# EAGLE board remote_v0.9-default.cb94c48f (EAGLE 7.7.0)
BOARDNAME: BERTL-06-1; REVISION: R1.0; VERSION: V1.0
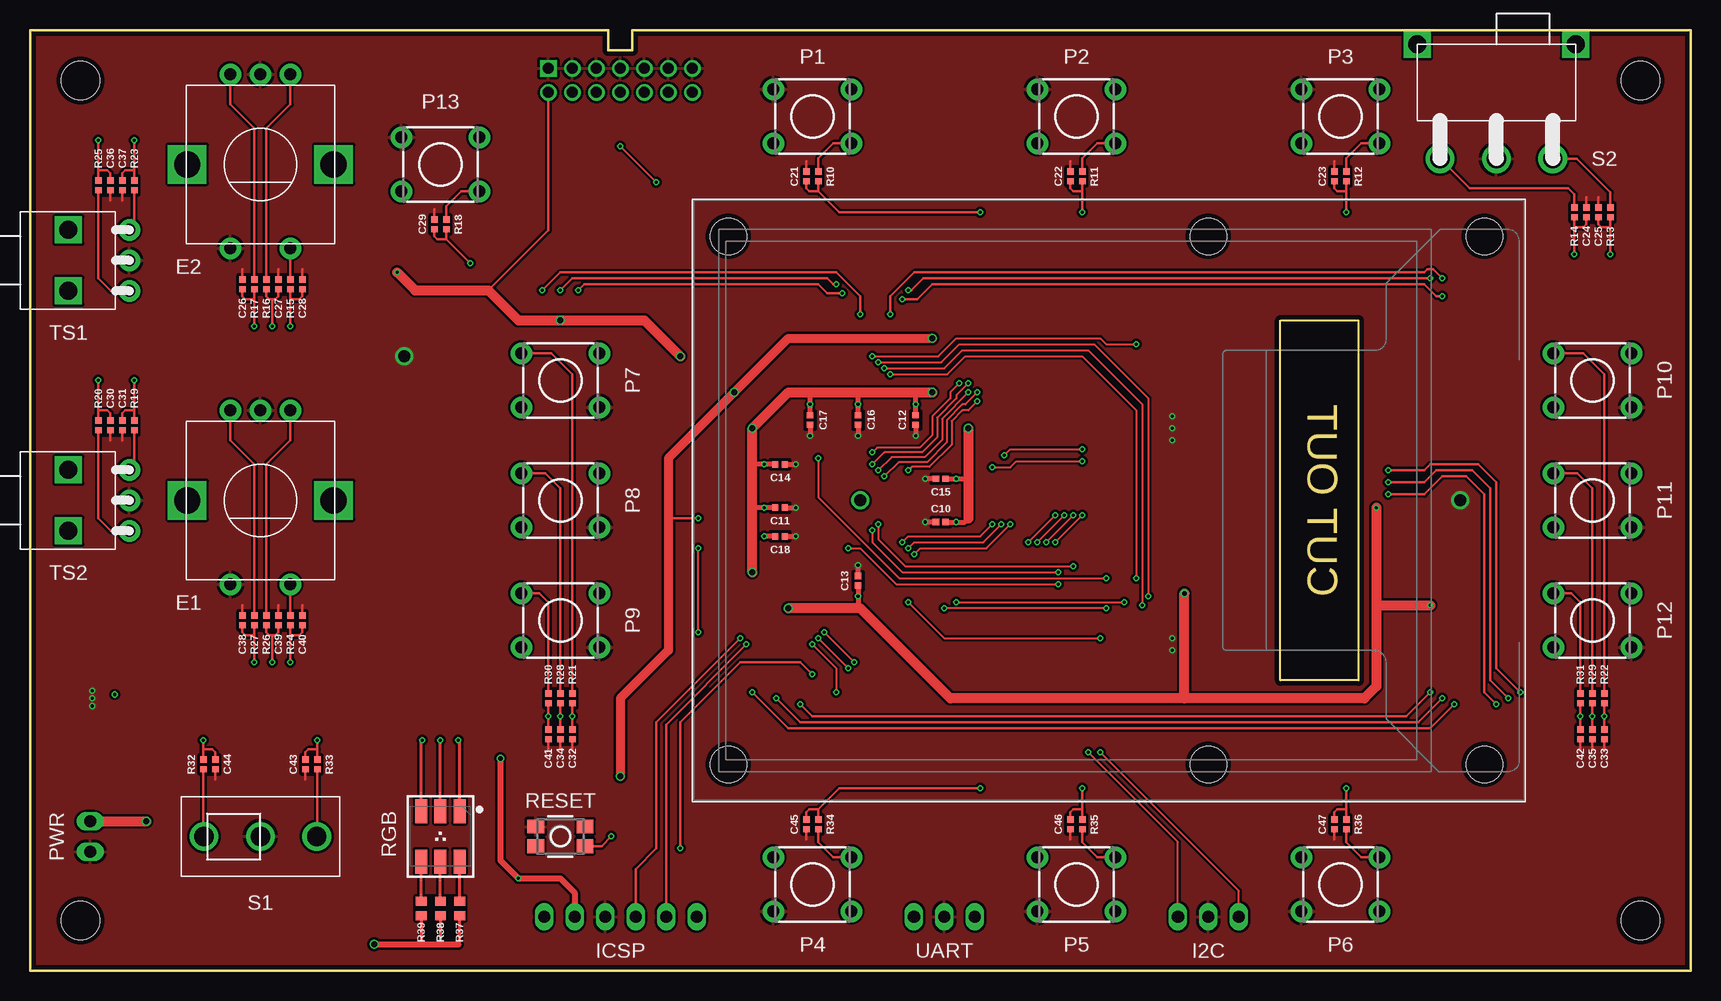
[diagram p0: board, top side]
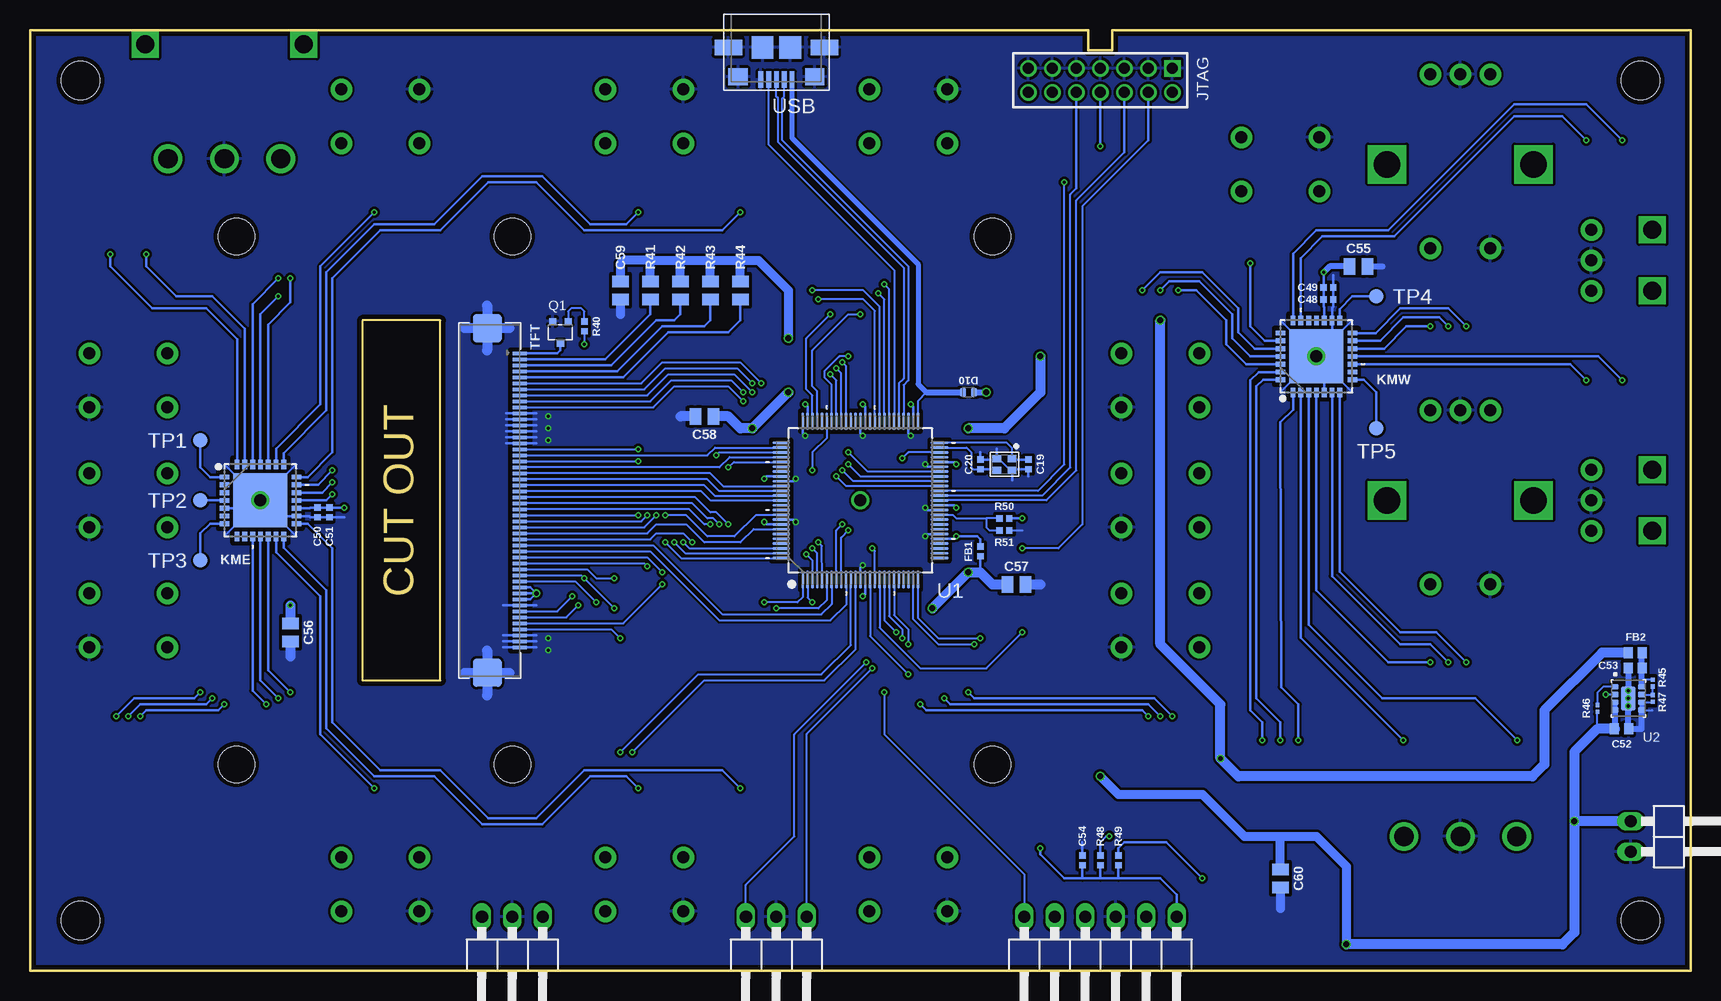
[diagram p1: board, bottom side, seen from below]

Size 138.4 x 78.4 mm. Coordinates in mm from the lower left corner, seen from the top.
Outline: 0,78.4 48.2,78.4 48.2,76.7 50.2,76.7 50.2,78.4 138.4,78.4 138.4,0 0,0 0,78.4
Outline: 104.2,54.2 110.7,54.2 110.7,24.2 104.2,24.2 104.2,54.2
Copper layers (1*16): Top 0.0356mm / dielectric 1.5011mm / Bottom 0.0356mm
Design rules "OSHPark-2layer-new *": minimum track width 6mil, minimum drill 10mil, track to track 6mil, track to pad 6mil, pad to pad 6mil, via to via 6mil, smd to smd 6mil, copper to edge 15mil, drill to drill 6mil, minimum pad ring 5mil, minimum via ring 5mil, stop-mask expansion 2mil, vias tented up to drill 25mil, thermal gap 10mil
Net classes: 0 default: width 0.152 mm, drill 0.254 mm, clearance 0.152 mm
Holes 3.2 mm at 4.2,74.2 4.2,4.2 134.2,4.2 134.2,74.2
Holes 3 mm at 121.2,61.2 58.2,61.2 58.2,17.2 121.2,17.2 98.2,61.2 98.2,17.2
tKeepout: area 55.7,58.7 to 60.7,63.7; area 95.7,58.7 to 100.7,63.7; area 118.7,58.7 to 123.7,63.7; area 118.7,14.7 to 123.7,19.7; area 95.7,14.7 to 100.7,19.7; area 55.7,14.7 to 60.7,19.7; area 130.2,0.2 to 138.2,8.2; area 130.2,70.2 to 138.2,78.2; area 0.2,70.2 to 8.2,78.2; area 0.2,0.2 to 8.2,8.2
bKeepout: area 54.2,57.2 to 62.2,65.2; area 94.2,57.2 to 102.2,65.2; area 117.2,57.2 to 125.2,65.2; area 117.2,13.2 to 125.2,21.2; area 94.2,13.2 to 102.2,21.2; area 54.2,13.2 to 62.2,21.2; area 0.2,70.2 to 8.2,78.2; area 0.2,0.2 to 8.2,8.2; area 130.2,0.2 to 138.2,8.2; area 130.2,70.2 to 138.2,78.2

## Footprints (pad centres in the part's own frame; a part is rotated, then mirrored left to right if it is on the bottom)
0402-C = smd 0.52 x 0.52: 1 -0.4,0; 2 0.4,0
0603-C = smd 0.75 x 0.9: 1 -0.6,0; 2 0.6,0
0805-C = smd 0.95 x 1.35: 1 -0.75,0; 2 0.75,0
DFN1006D-2 = smd 0.5 x 0.7: A 0.45,0; C -0.45,0
EC11_SW = drill 1 pad 1.778: A -2.5,-7.5; B 2.5,-7.5; C 0,-7.5; D -2.5,7; E 2.5,7 | drill 2.2 square: GND1 -6.1,0; GND2 6.1,0
1X03/90 = drill 1.016 long: 1 -2.54,-3.81; 2 0,-3.81; 3 2.54,-3.81
1X06/90 = drill 1.016 long: 1 -6.35,-3.81; 2 -3.81,-3.81; 3 -1.27,-3.81; 4 1.27,-3.81; 5 3.81,-3.81; 6 6.35,-3.81
2X07M = drill 0.914 square: 1 -6,-1 | drill 0.914: 2 -6,1; 3 -4,-1; 4 -4,1; 5 -2,-1; 6 -2,1; 7 0,-1; 8 0,1; 9 2,-1; 10 2,1; 11 4,-1; 12 4,1; 13 6,-1; 14 6,1
QFN65P600X600X100-29N = smd 0.8 x 0.4: 1 -3,1.95; 2 -3,1.3; 3 -3,0.65; 4 -3,0; 5 -3,-0.65; 6 -3,-1.3; 7 -3,-1.95; 15 3,-1.95; 16 3,-1.3; 17 3,-0.65; 18 3,0; 19 3,0.65; 20 3,1.3; 21 3,1.95 | smd 0.4 x 0.8: 8 -1.95,-3; 9 -1.3,-3; 10 -0.65,-3; 11 0,-3; 12 0.65,-3; 13 1.3,-3; 14 1.95,-3; 22 1.95,3; 23 1.3,3; 24 0.65,3; 25 0,3; 26 -0.65,3; 27 -1.3,3; 28 -1.95,3 | smd 4.5 x 4.5: EP 0,0
6X6-THT = drill 1 pad 1.778: 1 -3.25,2.25; 2 3.25,2.25; 3 -3.25,-2.25; 4 3.25,-2.25
1X02/90 = drill 1.016 long: 1 -2.54,-3.81; 2 0,-3.81
SOT323 = smd 0.6 x 0.55: 1 -0.65,-0.925; 2 0.65,-0.925; 3 0,0.925
0201-C = smd 0.36 x 0.32: 1 -0.28,0; 2 0.28,0
3X4MM = smd 1.4 x 1.15: 1 -2.05,0.825; 2 2.05,0.825; 3 -2.05,-0.825; 4 2.05,-0.825
RGBLED_PLCC6 = smd 1 x 2: 1 -1.6,-2.108; 2 0,-2.108; 3 1.6,-2.108; 4 1.6,2.108; 5 0,2.108; 6 -1.6,2.108
1101M2S3CBE2 = drill 1.6: 1 -4.699,0; 2 0,0; 3 4.699,0
1101M2S3ABE2 = drill 1.6: 1 -4.699,9.525; 2 0,9.525; 3 4.699,9.525 | drill 1.5 square: 4 -6.604,0; 5 6.604,0
TFT_2.83IN_240X320_50PIN = smd 0.275 x 1.2 bottom: 1 12.25,-10.39; 2 11.75,-10.39; 3 11.25,-10.39; 4 10.75,-10.39; 5 10.25,-10.39; 6 9.75,-10.39; 7 9.25,-10.39; 8 8.75,-10.39; 9 8.25,-10.39; 10 7.75,-10.39; 11 7.25,-10.39; 12 6.75,-10.39; 13 6.25,-10.39; 14 5.75,-10.39; 15 5.25,-10.39; 16 4.75,-10.39; 17 4.25,-10.39; 18 3.75,-10.39; 19 3.25,-10.39; 20 2.75,-10.39; 21 2.25,-10.39; 22 1.75,-10.39; 23 1.25,-10.39; 24 0.75,-10.39; 25 0.25,-10.39; 26 -0.25,-10.39; 27 -0.75,-10.39; 28 -1.25,-10.39; 29 -1.75,-10.39; 30 -2.25,-10.39; 31 -2.75,-10.39; 32 -3.25,-10.39; 33 -3.75,-10.39; 34 -4.25,-10.39; 35 -4.75,-10.39; 36 -5.25,-10.39; 37 -5.75,-10.39; 38 -6.25,-10.39; 39 -6.75,-10.39; 40 -7.25,-10.39; 41 -7.75,-10.39; 42 -8.25,-10.39; 43 -8.75,-10.39; 44 -9.25,-10.39; 45 -9.75,-10.39; 46 -10.25,-10.39; 47 -10.75,-10.39; 48 -11.25,-10.39; 49 -11.75,-10.39; 50 -12.25,-10.39 | smd 2.4 x 2.4 bottom: PAD1 14.35,-13.09; PAD2 -14.35,-13.09
TP12R = smd 1.2 x 1.2: TP 0,0
200SPXTXBXM6 = drill 1 pad 1.778: 1 -2.54,5.08; 2 0,5.08; 3 2.54,5.08 | drill 1.5 square: 4 -2.54,0; 5 2.54,0
QFP40P1400X1400X120-100N = smd 1.473 x 0.229: 1 -6.6,4.8; 2 -6.6,4.4; 3 -6.6,4; 4 -6.6,3.6; 5 -6.6,3.2; 6 -6.6,2.8; 7 -6.6,2.4; 8 -6.6,2; 9 -6.6,1.6; 10 -6.6,1.2; 11 -6.6,0.8; 12 -6.6,0.4; 13 -6.6,0; 14 -6.6,-0.4; 15 -6.6,-0.8; 16 -6.6,-1.2; 17 -6.6,-1.6; 18 -6.6,-2; 19 -6.6,-2.4; 20 -6.6,-2.8; 21 -6.6,-3.2; 22 -6.6,-3.6; 23 -6.6,-4; 24 -6.6,-4.4; 25 -6.6,-4.8; 51 6.6,-4.8; 52 6.6,-4.4; 53 6.6,-4; 54 6.6,-3.6; 55 6.6,-3.2; 56 6.6,-2.8; 57 6.6,-2.4; 58 6.6,-2; 59 6.6,-1.6; 60 6.6,-1.2; 61 6.6,-0.8; 62 6.6,-0.4; 63 6.6,0; 64 6.6,0.4; 65 6.6,0.8; 66 6.6,1.2; 67 6.6,1.6; 68 6.6,2; 69 6.6,2.4; 70 6.6,2.8; 71 6.6,3.2; 72 6.6,3.6; 73 6.6,4; 74 6.6,4.4; 75 6.6,4.8 | smd 0.229 x 1.473: 26 -4.8,-6.6; 27 -4.4,-6.6; 28 -4,-6.6; 29 -3.6,-6.6; 30 -3.2,-6.6; 31 -2.8,-6.6; 32 -2.4,-6.6; 33 -2,-6.6; 34 -1.6,-6.6; 35 -1.2,-6.6; 36 -0.8,-6.6; 37 -0.4,-6.6; 38 0,-6.6; 39 0.4,-6.6; 40 0.8,-6.6; 41 1.2,-6.6; 42 1.6,-6.6; 43 2,-6.6; 44 2.4,-6.6; 45 2.8,-6.6; 46 3.2,-6.6; 47 3.6,-6.6; 48 4,-6.6; 49 4.4,-6.6; 50 4.8,-6.6; 76 4.8,6.6; 77 4.4,6.6; 78 4,6.6; 79 3.6,6.6; 80 3.2,6.6; 81 2.8,6.6; 82 2.4,6.6; 83 2,6.6; 84 1.6,6.6; 85 1.2,6.6; 86 0.8,6.6; 87 0.4,6.6; 88 0,6.6; 89 -0.4,6.6; 90 -0.8,6.6; 91 -1.2,6.6; 92 -1.6,6.6; 93 -2,6.6; 94 -2.4,6.6; 95 -2.8,6.6; 96 -3.2,6.6; 97 -3.6,6.6; 98 -4,6.6; 99 -4.4,6.6; 100 -4.8,6.6
MICROSIP = smd 0.48 x 0.58: 1 -0.975,-1.1; 2 -0.325,-1.1; 3 0.325,-1.1; 4 0.975,-1.1; 5 0.975,1.1; 6 0.325,1.1; 7 -0.325,1.1; 8 -0.975,1.1 | smd 2 x 1.2: EP 0,0
MICRO-AB-H-SMT = smd 0.4 x 1.35: 1 -1.3,4.125; 2 -0.65,4.125; 3 0,4.125; 4 0.65,4.125; 5 1.3,4.125 | smd 2.3 x 1.3: Z1 -4,1.45; Z4 4,1.45 | smd 1.8 x 1.9: Z2 -1.15,1.45; Z3 1.15,1.45 | smd 1.6 x 1.4: Z5 -3.2,3.9; Z6 3.2,3.9
2.0X1.6 = smd 0.75 x 0.65: 1 -0.65,-0.5; 2 0.65,-0.5; 3 0.65,0.5; 4 -0.65,0.5

## Placement (x,y rotation side)
C10  100n  [0402-C]  75.9,37.4 180 top
C11  100n  [0402-C]  62.5,38.6 0 top
C12  100n  [0402-C]  73.8,45.9 270 top
C13  100n  [0402-C]  69,32.5 90 top
C14  100n  [0402-C]  62.5,42.2 0 top
C15  100n  [0402-C]  75.9,41 180 top
C16  100n  [0402-C]  69,45.9 270 top
C17  100n  [0402-C]  65,45.9 270 top
C18  100n  [0402-C]  62.5,36.2 0 top
C19  100n  [0402-C]  55.2,42.2 270 bottom
C20  100n  [0402-C]  59.2,42.2 90 bottom
C21  [0402-C]  64.7,66.2 90 top
C22  [0402-C]  86.7,66.2 90 top
C23  [0402-C]  108.7,66.2 90 top
C24  [0402-C]  129.7,63.2 90 top
C25  [0402-C]  130.7,63.2 90 top
C26  [0402-C]  17.7,57.2 90 top
C27  [0402-C]  20.7,57.2 90 top
C28  [0402-C]  22.7,57.2 90 top
C29  [0402-C]  33.7,62.2 90 top
C30  [0402-C]  6.7,45.45 270 top
C31  [0402-C]  7.7,45.45 270 top
C32  [0402-C]  45.2,19.7 90 top
C33  [0402-C]  131.2,19.7 90 top
C34  [0402-C]  44.2,19.7 90 top
C35  [0402-C]  130.2,19.7 90 top
C36  [0402-C]  6.7,65.45 270 top
C37  [0402-C]  7.7,65.45 270 top
C38  [0402-C]  17.7,29.2 90 top
C39  [0402-C]  20.7,29.2 90 top
C40  [0402-C]  22.7,29.2 90 top
C41  [0402-C]  43.2,19.7 90 top
C42  [0402-C]  129.2,19.7 90 top
C43  [0402-C]  22.95,17.2 270 top
C44  [0402-C]  15.45,17.2 270 top
C45  [0402-C]  64.7,12.2 90 top
C46  [0402-C]  86.7,12.2 90 top
C47  [0402-C]  108.7,12.2 90 top
C48  100n  [0402-C]  30.2,55.95 0 bottom
C49  100n  [0402-C]  30.2,56.95 0 bottom
C50  100n  [0402-C]  114.45,38.2 270 bottom
C51  100n  [0402-C]  113.45,38.2 270 bottom
C52  [0603-C]  5.77,20.16 0 bottom
C53  [0603-C]  4.63,25.24 180 bottom
C54  [0402-C]  50.7,9.2 90 bottom
C55  100n  [0805-C]  27.7,58.7 0 bottom
C56  100n  [0805-C]  116.7,28.2 270 bottom
C57  [0805-C]  56.2,32.2 0 bottom
C58  [0805-C]  82.2,46.2 180 bottom
C59  100n  [0805-C]  89.2,56.7 270 bottom
C60  100n  [0805-C]  34.2,7.7 270 bottom
D10  PMEG2010BELD  [DFN1006D-2]  60.2,48.2 180 bottom
E1  EC11_SW  [EC11_SW]  19.2,39.2 180 top
E2  EC11_SW  [EC11_SW]  19.2,67.2 180 top
FB1  [0402-C]  59.2,34.95 90 bottom
FB2  [0603-C]  4.63,26.51 180 bottom
I2C  [1X03/90]  98.2,0.7 180 bottom
ICSP  [1X06/90]  49.2,0.7 180 bottom
JTAG  [2X07M]  49.2,74.2 180 bottom
KME  PIC16F1718-I/ML  [QFN65P600X600X100-29N]  119.2,39.2 0 bottom
KMW  PIC16F1718-I/ML  [QFN65P600X600X100-29N]  31.2,51.2 90 bottom
P1  DTSM-6THT  [6X6-THT]  65.2,71.2 0 top
P2  DTSM-6THT  [6X6-THT]  87.2,71.2 0 top
P3  DTSM-6THT  [6X6-THT]  109.2,71.2 0 top
P4  DTSM-6THT  [6X6-THT]  65.2,7.2 0 top
P5  DTSM-6THT  [6X6-THT]  87.2,7.2 0 top
P6  DTSM-6THT  [6X6-THT]  109.2,7.2 0 top
P7  DTSM-6THT  [6X6-THT]  44.2,49.2 0 top
P8  DTSM-6THT  [6X6-THT]  44.2,39.2 0 top
P9  DTSM-6THT  [6X6-THT]  44.2,29.2 0 top
P10  DTSM-6THT  [6X6-THT]  130.2,49.2 0 top
P11  DTSM-6THT  [6X6-THT]  130.2,39.2 0 top
P12  DTSM-6THT  [6X6-THT]  130.2,29.2 0 top
P13  DTSM-6THT  [6X6-THT]  34.2,67.2 0 top
PWR  [1X02/90]  1.2,9.91 270 bottom
Q1  NX3008NBKW  [SOT323]  94.2,53.2 180 bottom
R10  [0402-C]  65.7,66.2 90 top
R11  [0402-C]  87.7,66.2 90 top
R12  [0402-C]  109.7,66.2 90 top
R13  [0402-C]  131.7,63.2 90 top
R14  [0402-C]  128.7,63.2 90 top
R15  [0402-C]  21.7,57.2 270 top
R16  [0402-C]  19.7,57.2 90 top
R17  [0402-C]  18.7,57.2 90 top
R18  [0402-C]  34.7,62.2 270 top
R19  [0402-C]  8.7,45.45 270 top
R20  [0402-C]  5.7,45.45 270 top
R21  [0402-C]  45.2,22.7 90 top
R22  [0402-C]  131.2,22.7 90 top
R23  [0402-C]  8.7,65.45 270 top
R24  [0402-C]  21.7,29.2 270 top
R25  [0402-C]  5.7,65.45 270 top
R26  [0402-C]  19.7,29.2 90 top
R27  [0402-C]  18.7,29.2 90 top
R28  [0402-C]  44.2,22.7 90 top
R29  [0402-C]  130.2,22.7 90 top
R30  [0402-C]  43.2,22.7 90 top
R31  [0402-C]  129.2,22.7 90 top
R32  [0402-C]  14.45,17.2 270 top
R33  [0402-C]  23.95,17.2 270 top
R34  [0402-C]  65.7,12.2 90 top
R35  [0402-C]  87.7,12.2 90 top
R36  [0402-C]  109.7,12.2 90 top
R37  [0603-C]  35.8,5.2 90 top
R38  [0603-C]  34.2,5.2 90 top
R39  [0603-C]  32.6,5.2 90 top
R40  [0402-C]  92.2,53.7 270 bottom
R41  [0805-C]  86.7,56.7 270 bottom
R42  [0805-C]  84.2,56.7 270 bottom
R43  [0805-C]  81.7,56.7 270 bottom
R44  [0805-C]  79.2,56.7 270 bottom
R45  510k  [0201-C]  3.18,23.98 90 bottom
R46  10k  [0201-C]  7.78,21.88 270 bottom
R47  162k  [0201-C]  3.18,22.7 90 bottom
R48  [0402-C]  49.2,9.2 270 bottom
R49  [0402-C]  47.7,9.2 90 bottom
R50  10k  [0402-C]  57.2,37.7 0 bottom
R51  10k  [0402-C]  57.2,36.7 180 bottom
RESET  DTSM-6  [3X4MM]  44.2,11.2 0 top
RGB  [RGBLED_PLCC6]  34.2,11.2 180 top
S1  [1101M2S3CBE2]  19.2,11.2 0 top
S2  [1101M2S3ABE2]  122.2,77.2 180 top
TFT  [TFT_2.83IN_240X320_50PIN]  87.2,39.2 90 top
TP1  TPTP12R  [TP12R]  124.2,44.2 0 bottom
TP2  TPTP12R  [TP12R]  124.2,39.2 0 bottom
TP3  TPTP12R  [TP12R]  124.2,34.2 0 bottom
TP4  TPTP12R  [TP12R]  26.2,56.2 0 bottom
TP5  TPTP12R  [TP12R]  26.2,45.2 0 bottom
TS1  [200SPXTXBXM6]  3.2,59.2 270 top
TS2  [200SPXTXBXM6]  3.2,39.2 270 top
U1  PIC32MZ-100  [QFP40P1400X1400X120-100N]  69.2,39.2 90 bottom
U2  TPS82085  [MICROSIP]  5.2,22.7 270 bottom
UART  [1X03/90]  76.2,0.7 180 bottom
USB  5_USB_3S  [MICRO-AB-H-SMT]  76.2,78.4 180 bottom
X1  SMD-4P-2G-2.0X1.6  [2.0X1.6]  57.2,42.2 180 bottom

## Library data of the parts
C10-C60 FB1 FB2 R10-R51 = generic-rcl
D10 = pmeg2010beld
E1 E2 = encoder
I2C JTAG PWR UART = pinhead-2
ICSP = pinhead
KME KMW = pic16f1718
P1-P13 RESET S1 S2 TS1 TS2 = switch
Q1 = transistor
RGB = rgb_led
TFT = tft
TP1-TP5 = testpad
U1 = pic32mz
U2 = TPS82085
USB = usb
X1 = xtal

## Nets
3V3: C10.1 C11.1 C12.1 C13.1 C14.1 C15.1 C16.1 C17.1 C48.1 C49.1 C50.1 C51.1 C55.1 C56.1 C57.1 C58.1 FB1.1 FB2.2 ICSP.2 JTAG.2 KME.17 KMW.17 R49.2 TFT.40 TFT.41 TFT.42 U1.14 U1.37 U1.46 U1.52 U1.62 U1.74 U1.83 U1.93
5V0: C52.1 C59.1 C60.1 D10.C PWR.1 R37.1 R38.1 R39.1 R41.1 R42.1 R43.1 R44.1 R46.2 R50.2 U2.3 U2.4
!MCLR: C54.1 ICSP.1 R48.2 R49.1 U1.15
!SS6: TFT.38 U1.6 U1.68
AN6: R50.1 R51.2 U1.35
AVDD: C18.1 FB1.2 U1.30
B: KMW.27 RGB.1
B14_L12_P: U2.2
D+: U1.55 USB.3
D-: U1.54 USB.2
E1_A: C39.1 KMW.6 R26.1
E1_B: C38.1 KMW.7 R27.1
E1_S: C40.1 KMW.4 R24.2
E2_A: C27.1 KMW.13 R16.1
E2_B: C26.1 KMW.14 R17.1
E2_S: C28.1 KMW.12 R15.2
EN_B: R46.1 U2.1
FB_B: R45.1 R47.2 U2.7
G: KMW.28 RGB.2
GND: C10.2 C11.2 C12.2 C13.2 C14.2 C15.2 C16.2 C17.2 C18.2 C19.2 C20.2 C21.2 C22.2 C23.2 C24.2 C25.2 C26.2 C27.2 C28.2 C29.2 C30.2 C31.2 C32.1 C33.1 C34.1 C35.1 C36.2 C37.2 C38.2 C39.2 C40.2 C41.1 C42.1 C43.2 C44.2 C45.1 C46.1 C47.1 C48.2 C49.2 C50.2 C51.2 C52.2 C53.2 C54.2 C55.2 C56.2 C57.2 C58.2 C59.2 C60.2 E1.C E1.E E2.C E2.E I2C.2 ICSP.3 JTAG.1 JTAG.3 JTAG.5 JTAG.7 JTAG.9 JTAG.11 JTAG.13 KME.5 KME.16 KME.EP KMW.5 KMW.16 KMW.EP P1.1 P2.1 P3.1 P4.3 P5.3 P6.3 P7.4 P8.4 P9.4 P10.4 P11.4 P12.4 P13.1 PWR.2 Q1.2 R47.1 R51.1 RESET.1 S1.2 S2.2 TFT.11 TFT.12 TFT.13 TFT.14 TFT.15 TFT.16 TFT.43 TFT.48 TFT.49 TFT.50 TS1.2 TS2.2 U1.13 U1.31 U1.36 U1.45 U1.53 U1.63 U1.75 U1.84 U1.92 U2.5 U2.6 U2.EP UART.2 USB.5 USB.Z1 USB.Z2 USB.Z3 USB.Z4 USB.Z5 USB.Z6 X1.2 X1.4
KME_!MCLR: KME.26 U1.73
KME_PCLK: KME.24 U1.59
KME_PDAT: KME.25 U1.60
KMW_!MCLR: KMW.26 U1.72
KMW_PCLK: KMW.24 U1.58
KMW_PDAT: KMW.25 U1.57
LED_A1: R41.2 TFT.2
LED_A2: R42.2 TFT.3
LED_A3: R43.2 TFT.4
LED_A4: R44.2 TFT.5
LED_CK: Q1.3 TFT.1
N$2: E2.A R16.2
N$3: P1.4 R10.2
N$5: E2.B R17.2
N$6: P2.4 R11.2
N$7: P3.4 R12.2
N$8: E2.D R15.1
N$10: R19.2 TS2.1
N$11: R20.2 TS2.3
N$13: R23.2 TS1.1
N$14: R25.2 TS1.3
N$15: R13.2 S2.1
N$16: R14.2 S2.3
N$17: E1.A R26.2
N$18: E1.B R27.2
N$19: E1.D R24.1
N$20: R32.2 S1.1
N$21: R33.2 S1.3
N$22: P4.2 R34.1
N$23: P5.2 R35.1
N$24: P6.2 R36.1
N$25: P9.1 R30.2
N$26: P12.1 R31.2
N$27: P8.1 R28.2
N$28: P11.1 R29.2
N$29: P7.1 R21.2
N$30: P10.1 R22.2
N$33: KMW.8 TP5.TP
N$34: R39.2 RGB.4
N$35: R38.2 RGB.5
N$37: KME.1 TP1.TP
N$38: KME.7 TP3.TP
N$39: KME.4 TP2.TP
N$41: R37.2 RGB.6
N$43: P13.4 R18.1
N$44: KMW.15 TP4.TP
N$45: R48.1 RESET.4
N$46: Q1.1 R40.1
OSC1: C20.1 U1.49 X1.3
OSC2: C19.1 U1.50 X1.1
P1: C21.1 KME.21 R10.1
P2: C22.1 KME.22 R11.1
P3: C23.1 KME.23 R12.1
P4: C45.2 KME.15 R34.2
P5: C46.2 KME.14 R35.2
P6: C47.2 KME.13 R36.2
P7: C32.2 KME.12 R21.1
P8: C34.2 KME.11 R28.1
P9: C41.2 KME.10 R30.1
P10: C33.2 KME.20 R22.1
P11: C35.2 KME.19 R29.1
P12: C42.2 KME.18 R31.1
P13: C29.1 KMW.23 R18.2
PGEC1: ICSP.5 U1.24
PGED1: ICSP.4 U1.25
PMD0: TFT.32 U1.91
PMD1: TFT.31 U1.94
PMD2: TFT.30 U1.98
PMD3: TFT.29 U1.99
PMD4: TFT.28 U1.100
PMD5: TFT.27 U1.3
PMD6: TFT.26 U1.4
PMD7: TFT.25 U1.5
PMD8: TFT.24 U1.88
PMD9: TFT.23 U1.87
PMD10: TFT.22 U1.86
PMD11: TFT.21 U1.85
PMD12: TFT.20 U1.79
PMD13: TFT.19 U1.80
PMD14: TFT.18 U1.77
PMD15: TFT.17 U1.78
PMRD: TFT.35 U1.9
PMWR: TFT.36 U1.8
R: KMW.1 RGB.3
RA4: U1.61
RA5: TFT.47 U1.2
RA6: U1.89
RA7: U1.90
RA9: U1.28
RA10: U1.29
RB4: U1.21
RB12: TFT.9 U1.41
RB13: TFT.8 U1.42
RD1: U1.76
RG12: U1.96
RG13: U1.97
RG14: U1.95
RG15: TFT.39 U1.1
RPB2/4RX/6RX/SS2/SDI6: U1.23
RPB3/3RX/SDI2/SDI4: U1.22
RPB5: ICSP.6 U1.20
RPB6/4RX/6RX/SS2/SDI6: U1.26
RPB7/2RX/SS1/SS3-SS5: U1.27
RPB8/2RX/SS1/SS3-SS5: U1.32
RPB9/1RX/5RX/SDI1/SDI3/SDI5/SS6: U1.33
RPB10/1RX/5RX/SDI1/SDI3/SDI5/SS6: U1.34
RPB14: TFT.7 U1.43
RPB15: TFT.6 U1.44
RPD0: U1.71
RPD4: U1.81
RPD5: U1.82
RPD10: R40.2 U1.69
RPD11: TFT.10 U1.70
RPD15: U1.47
RPE8: U1.18 UART.3
RPE9: U1.19 UART.1
RPG9: TFT.46 U1.16
S1_A: C44.1 KMW.3 R32.1
S1_B: C43.1 KMW.2 R33.1
S2_A: C25.1 KME.28 R13.1
S2_B: C24.1 KME.27 R14.1
SCK6: TFT.37 U1.48
SCL1: TFT.44 U1.66
SCL4: I2C.1 U1.12
SCL5: U1.65
SDA1: TFT.45 U1.67
SDA4: I2C.3 U1.11
SDA5: U1.64
SDI6: TFT.33 U1.7
SDO6: TFT.34 U1.10
TCK: JTAG.6 U1.38
TDI: JTAG.10 U1.39
TDO: JTAG.8 U1.40
TMS: JTAG.4 U1.17
TS1_A: C37.1 KMW.20 R23.1
TS1_B: C36.1 KMW.21 R25.1
TS2_A: C31.1 KMW.10 R19.1
TS2_B: C30.1 KMW.11 R20.1
USBID: U1.56 USB.4
VBUS: D10.A U1.51 USB.1
VOUT_B: C53.1 FB2.1 R45.2 U2.8

## Tracks (layer width: path | path; a pad name or v marks a point on that pad's centre or on a via)
3V3  (via drill 0.25, 0.35, 0.4, 0.5)
  Top 0.152: 65,48.2 65.2,48.2 | 69,48.2 69.2,48.2 | 73.8,48.2 73.7,48.2 | 60.2,38.6 60.2,38.7 | 69,30.2 69.2,30.2 | 78.2,41 78.2,41.2
  Top 0.203: JTAG.2 43.2,61.7 38.2,56.7
  Top 0.4: C17.1 v65,47.2 65,48.2 | C16.1 v69,47.2 69,48.2 | C12.1 v73.8,47.2 73.8,48.2 | C15.1 v77.2,41 78.2,41 | C10.1 v77.2,37.4 77.9,37.4 78.2,37.7 | C13.1 v69,31.2 69,30.2 | C11.1 v61.2,38.6 60.2,38.6 | C14.1 v61.2,42.2 60.2,42.2
  Top 0.5: v39.2,17.7 39.2,9.2 v40.7,7.7 44.2,7.7 45.39,6.51 ICSP.2
  Top 0.813: v112.2,38.6 112.2,30.45 | 112.2,30.45 112.2,23.7 111.2,22.7 96.2,22.7 | 96.2,22.7 76.7,22.7 69.2,30.2 v63.2,30.2 | v60.2,33.2 60.2,38.7 60.2,42.2 v60.2,45.2 63.2,48.2 65.2,48.2 69.2,48.2 73.7,48.2 v75.2,48.2 | v78.2,45.2 78.2,41.2 78.2,37.7 | v30.6,58.2 32.1,56.7 38.2,56.7 40.7,54.2 v44.2,54.2 51.2,54.2 v54.2,51.2 | 96.2,22.7 v96.2,31.45 | 112.2,30.45 v116.7,30.45
  Bottom 0.203: KMW.17 30.55,55.3 30.6,55.35 C48.1 C49.1 v30.6,58.2 | KME.17 115.1,38.55 115.05,38.6 C50.1 C51.1 v112.2,38.6 | U1.46 61.4,42.4 v61.2,42.2 | v69,47.2 68.8,47 U1.62 | U1.74 73.6,47 v73.8,47.2 | U1.83 77,41.2 v77.2,41 | U1.93 77,37.2 v77.2,37.4 | U1.14 68.8,31.4 v69,31.2 | U1.37 61.4,38.8 v61.2,38.6 | U1.52 64.8,47 v65,47.2 | TFT.41 v96.2,31.45 | TFT.40 96.7,31.95 v96.2,31.45 | TFT.42 96.7,30.95 v96.2,31.45 | v40.7,7.7 43.7,10.7 47.2,10.7 47.7,10.2 R49.2 | FB1.1 59.2,33.2
  Bottom 0.5: C55.1 30.1,58.7 v30.6,58.2
  Bottom 0.813: FB2.2 7.39,26.51 12.2,21.7 12.2,17.2 13.2,16.2 37.7,16.2 v39.2,17.7 39.2,22.2 44.2,27.2 v44.2,54.2 | v63.2,30.2 v60.2,33.2 59.2,33.2 58.2,32.2 C57.1 | v75.2,48.2 v78.2,45.2 79.2,45.2 80.2,46.2 C58.1 | v54.2,51.2 54.2,48.2 57.2,45.2 v60.2,45.2 | v116.7,30.45 C56.1
5V0  (via drill 0.25, 0.5)
  Top 0.203: 35.7,2.2 35.8,2.3 | 53.2,37.7 v55.7,37.7
  Top 0.254: 35.8,2.3 R37.1 | R39.1 32.6,2.2 | R38.1 34.2,2.2
  Top 0.5: v28.7,2.2 32.6,2.2 34.2,2.2 35.7,2.2
  Top 0.75: v49.2,16.2 49.2,22.7 53.2,26.7 53.2,37.7 53.2,42.7 v58.7,48.2 63.2,52.7 v75.2,52.7
  Top 0.813: PWR.1 v9.7,12.45
  Bottom 0.152: 7.78,20.16 R46.2
  Bottom 0.203: v55.7,37.7 R50.2
  Bottom 0.406: U2.4 U2.3
  Bottom 0.5: D10.C v58.7,48.2
  Bottom 0.508: C52.1 6.3,20.16 U2.4
  Bottom 0.75: v49.2,16.2 47.7,14.7 40.7,14.7 37.2,11.2 34.2,11.2 | 34.2,11.2 31.2,11.2 28.7,8.7 v28.7,2.2 | R41.1 86.7,59.2 | 86.7,59.2 84.2,59.2 | 84.2,59.2 81.7,59.2 | 81.7,59.2 79.2,59.2 | 79.2,59.2 77.7,59.2 75.2,56.7 v75.2,52.7 | R44.1 79.2,59.2 | R43.1 81.7,59.2 | R42.1 84.2,59.2 | 86.7,59.2 88.95,59.2 89.2,58.95 C59.1 | C60.1 34.2,11.2
  Bottom 0.813: 6.3,20.16 7.78,20.16 9.7,18.24 v9.7,12.45 | v9.7,12.45 9.7,3.2 10.7,2.2 v28.7,2.2 | PWR.1 v9.7,12.45
!MCLR  (via drill 0.25)
  Top 0.203: v65.2,24.7 64.2,25.7 59.2,25.7 54.2,20.7 v54.2,10.2
  Bottom 0.152: U1.15 68.4,27.9 v65.2,24.7
  Bottom 0.203: v54.2,10.2 54.2,9.7 52.2,7.7 50.7,7.7 | ICSP.1 42.85,6.35 44.2,7.7 47.7,7.7 | 47.7,7.7 49.2,7.7 | 49.2,7.7 50.7,7.7 | 49.2,7.7 R48.2 | 50.7,7.7 C54.1 | 47.7,7.7 R49.1
!SS6  (via drill 0.25)
  Top 0.152: v71.7,49.7 76.45,49.7 77.95,51.2 87.7,51.2 92.2,46.7 v92.2,32.7 | v89.7,30.2 v76.2,30.2
  Bottom 0.152: U1.68 71.2,49.2 v71.7,49.7 | v89.7,30.2 v92.2,32.7 92.45,32.95 TFT.38 | U1.6 72,30.9 72.7,30.2 v76.2,30.2
AN6
  Bottom 0.152: U1.35 61.5,38 61.2,37.7 58.7,37.7 | 58.7,37.7 58.7,36.95 58.45,36.7 R51.2 | R50.1 58.7,37.7
AVDD  (via drill 0.25)
  Top 0.4: C18.1 v61.2,36.2
  Bottom 0.203: U1.30 61.4,36 v61.2,36.2 59.45,36.2 59.2,35.95 FB1.2
B  (via drill 0.25)
  Top 0.254: RGB.1 35.8,19.1 v35.7,19.2
  Bottom 0.203: v35.7,19.2 35.7,20.7 36.7,21.7 36.7,49.2 36,49.9 KMW.27
B14_L12_P  (via drill 0.25)
  Bottom 0.152: U2.2 v7.08,23.03
D+
  Bottom 0.152: USB.3 76.2,72.85 76.05,72.7 76.05,69.05 65.6,58.6 65.6,49.35 66,48.95 U1.55
D-
  Bottom 0.152: USB.2 75.55,72.85 75.7,72.7 75.7,69.2 65.2,58.7 65.2,49.2 65.6,48.8 U1.54
E1_A  (via drill 0.25)
  Top 0.203: C39.1 20.7,28.2 20.45,27.95 20.2,27.95 | 20.2,27.95 19.95,27.95 19.7,28.2 R26.1 | 20.2,27.95 v20.2,25.7
  Bottom 0.203: KMW.6 29.9,32.9 24.2,27.2 21.7,27.2 v20.2,25.7
E1_B  (via drill 0.25)
  Top 0.203: C38.1 17.7,28.2 17.95,27.95 18.7,27.95 | 18.7,27.95 R27.1 | 18.7,27.95 v18.7,25.7
  Bottom 0.203: KMW.7 29.25,33.25 24.2,28.2 21.2,28.2 v18.7,25.7
E1_S  (via drill 0.25)
  Top 0.203: R24.2 21.7,27.95 | 21.7,27.95 22.45,27.95 22.7,28.2 C40.1 | 21.7,27.95 v21.7,25.7
  Bottom 0.203: KMW.4 31.2,31.7 25.2,25.7 v21.7,25.7
E2_A  (via drill 0.25)
  Top 0.203: R16.1 19.7,56.2 19.95,55.95 20.2,55.95 | 20.2,55.95 20.45,55.95 20.7,56.2 C27.1 | 20.2,55.95 v20.2,53.7
  Bottom 0.203: KMW.13 25.9,52.5 23.95,54.45 20.95,54.45 v20.2,53.7
E2_B  (via drill 0.25)
  Top 0.203: C26.1 17.7,56.2 17.95,55.95 18.7,55.95 | 18.7,55.95 R17.1 | 18.7,55.95 v18.7,53.7
  Bottom 0.203: KMW.14 26.25,53.15 24.2,55.2 20.2,55.2 v18.7,53.7
E2_S  (via drill 0.25)
  Top 0.203: R15.2 21.7,55.95 | 21.7,55.95 22.45,55.95 22.7,56.2 C28.1 | 21.7,55.95 v21.7,53.7
  Bottom 0.203: KMW.12 25.55,51.85 23.7,53.7 v21.7,53.7
EN_B
  Bottom 0.152: U2.1 7.28,23.68 7.78,23.18 R46.1
FB_B
  Bottom 0.152: U2.7 3.18,23.03 | 3.18,23.03 R47.2 | 3.18,23.03 R45.1
G  (via drill 0.25)
  Top 0.254: RGB.2 v34.2,19.2
  Bottom 0.203: v34.2,19.2 34.2,20.7 36.2,22.7 36.2,48.7 35.65,49.25 KMW.28
GND  (via drill 0.25, 1)
  Top 0.203: C42.1 129.2,18.45 | C35.1 130.2,18.45 | C33.1 131.2,18.45 | C21.2 64.7,67.45 | C22.2 86.7,67.45 | C23.2 108.7,67.45 | C45.1 64.7,10.95 | C46.1 86.7,10.95 | C47.1 108.7,10.95 | C24.2 129.7,64.45 | C25.2 130.7,64.45 | C29.2 33.7,63.45 | C26.2 17.7,58.45 | C27.2 20.7,58.45 | C28.2 22.7,58.45 | C36.2 6.7,64.2 | C37.2 7.7,64.2 | C30.2 6.7,44.2 | C31.2 7.7,44.2 | C40.2 22.7,30.45 | C44.2 15.45,15.95 | C43.2 22.95,15.95 | C38.2 17.7,30.45 | C39.2 20.7,30.45 | C41.1 43.2,18.45 | C34.1 44.2,18.45 | C32.1 45.2,18.45
  Top 0.4: C17.2 v65,44.6 | C16.2 v69,44.6 | C12.2 v73.8,44.6 | C15.2 v74.6,41 | C10.2 v74.6,37.4 | C13.2 v69,33.8 | C11.2 v63.8,38.6 | C14.2 v63.8,42.2 | C18.2 v63.8,36.2
  Bottom 0.152: KME.EP 122.2,42.2 | KME.EP 116.2,42.2 | KME.EP 116.2,36.2 | KME.EP 122.2,36.2 | KMW.EP 28.2,48.2 | 31.1,51.3 28.2,54.2 | KMW.EP 34.2,54.2 | KMW.EP 34.2,48.2 | U2.6 3.18,22.38 R47.1 | U2.5 3.23,21.73 3.2,21.7 | 56.7,41.7 X1.4 56.45,41.8 | 57.7,42.7 X1.2 57.95,42.6 | R51.1 55.7,36.7
  Bottom 0.203: 75.83,37.6 U1.92 74.8,37.6 v74.6,37.4 | 75.83,40.8 U1.84 74.8,40.8 v74.6,41 | 74,45.83 U1.75 74,44.8 v73.8,44.6 | 62.58,42 U1.45 63.6,42 v63.8,42.2 | 62.58,38.4 U1.36 63.6,38.4 v63.8,38.6 | U1.63 69.2,44.8 v69,44.6 | U1.13 69.2,33.6 v69,33.8 | U1.53 65.2,44.8 v65,44.6 | U1.31 63.6,36.4 v63.8,36.2 | KMW.5 30.55,50.55 KMW.EP 31.1,51.3 29.9,52.5 KMW.16 29.9,55.25 29.8,55.35 C48.2 C49.2 29.8,57.95 | KME.5 119.85,38.55 KME.EP 117.9,37.9 KME.16 115.15,37.9 115.05,37.8 C50.2 C51.2 112.2,37.8 | 96.2,30.45 TFT.43 98.95,30.45 | 96.2,27.95 TFT.48 98.95,27.95 | 96.2,27.45 TFT.49 98.95,27.45 | 96.2,26.95 TFT.50 98.95,26.95 | 55.2,41.2 C19.2 56.45,41.8 | 59.2,43.2 C20.2 57.95,42.6 | 56.7,41.7 57.7,42.7 | X1.4 56.55,40.9 | X1.2 57.85,43.5 | 96.2,43.95 TFT.16 98.7,43.95 | 96.2,44.45 TFT.15 98.7,44.45 | C54.2 50.7,10.7 | 96.2,44.95 TFT.14 98.7,44.95 | 96.2,45.45 TFT.13 98.7,45.45 | 96.2,45.95 TFT.12 98.7,45.95 | 96.2,46.45 TFT.11 98.7,46.45
  Bottom 0.406: U2.6 U2.5
  Bottom 0.5: C55.2 25.7,58.7
  Bottom 0.508: C52.2 4.1,20.16 U2.5 | 5.2,25.24 v5.2,23.34 | 5.2,20.16 v5.2,22.07
  Bottom 0.61: 5.2,25.24 C53.2 | 5.2,20.16 C52.2
  Bottom 0.75: C59.2 89.2,54.7 | C60.2 34.2,5.2
  Bottom 0.813: C57.2 54.2,32.2 | C58.2 84.2,46.2 | C56.2 116.7,26.2 | 100.3,55.45 100.3,53.55 | 100.3,53.55 100.3,51.7 | 100.3,26.7 100.3,24.8 | 100.3,24.8 100.3,22.95 | 98.45,24.8 100.3,24.8 | 100.3,24.8 102.2,24.8 | 98.45,53.55 100.3,53.55 | 100.3,53.55 102.2,53.55
  Bottom 1.016: v5.2,23.34 U2.EP v5.2,22.07
  other vias: 119.2,39.2 31.2,51.2 5.2,22.7 95.2,26.7 95.2,27.7 95.2,46.2 95.2,45.2 95.2,44.2
  pour Top (isolate 0.2): 0.2,78.2 138.2,78.2 138.2,0.2 0.2,0.2
  pour Bottom (isolate 0.2, rank 3): 0.2,78.2 138.2,78.2 138.2,0.2 0.2,0.2
KME_!MCLR  (via drill 0.25)
  Top 0.203: v117.7,57.7 116.95,58.45 116.45,58.45 116.2,58.2 73.7,58.2 71.7,56.2 v71.7,54.7
  Bottom 0.152: U1.73 73.2,47.95 73.7,48.45 73.7,52.7 v71.7,54.7
  Bottom 0.203: KME.26 119.85,55.55 v117.7,57.7
KME_PCLK  (via drill 0.25)
  Top 0.203: v73.2,56.7 73.45,56.7 74.45,57.7 v116.7,57.7
  Bottom 0.152: U1.59 67.6,55.35 68.95,56.7 v73.2,56.7
  Bottom 0.203: v116.7,57.7 116.7,55.7 118.55,53.85 KME.24
KME_PDAT  (via drill 0.25)
  Top 0.203: v72.7,55.95 73.95,55.95 75.2,57.2 116.2,57.2 117.2,56.2 v117.7,56.2
  Bottom 0.152: U1.60 68,55 68.95,55.95 v72.7,55.95
  Bottom 0.203: v117.7,56.2 119.2,54.7 KME.25
KMW_!MCLR  (via drill 0.25)
  Top 0.203: v42.7,56.7 44.2,58.2 67.2,58.2 69.2,56.2 v69.2,54.7
  Bottom 0.152: U1.72 72.8,48.3 73.2,48.7 73.2,51.7 70.2,54.7 v69.2,54.7
  Bottom 0.203: KMW.26 37.05,50.55 38.7,52.2 38.7,54.2 41.2,56.7 v42.7,56.7
KMW_PCLK  (via drill 0.25)
  Top 0.203: v67.7,56.45 66.45,56.45 65.7,57.2 46.2,57.2 v45.7,56.7
  Bottom 0.152: U1.58 67.2,55.95 v67.7,56.45
  Bottom 0.203: v45.7,56.7 44.2,58.2 40.7,58.2 37.7,55.2 37.7,53.2 36.35,51.85 KMW.24
KMW_PDAT  (via drill 0.25)
  Top 0.203: v67.2,57.2 66.95,57.2 66.45,57.7 45.2,57.7 v44.2,56.7
  Bottom 0.152: U1.57 66.8,56.8 v67.2,57.2
  Bottom 0.203: v44.2,56.7 43.45,57.45 40.95,57.45 38.2,54.7 38.2,52.7 36.7,51.2 KMW.25
LED_A1
  Bottom 0.203: TFT.2 90.45,50.95 86.7,54.7 R41.2
LED_A2
  Bottom 0.203: TFT.3 89.95,50.45 86.2,54.2 84.7,54.2 84.2,54.7 R42.2
LED_A3
  Bottom 0.203: TFT.4 89.45,49.95 85.7,53.7 82.2,53.7 81.7,54.2 R43.2
LED_A4
  Bottom 0.203: TFT.5 88.95,49.45 85.2,53.2 80.2,53.2 79.2,54.2 R44.2
LED_CK
  Bottom 0.203: TFT.1 94.45,51.45 94.2,51.7 Q1.3
N$1
  cutout Bottom: 6.79,20.77 4.76,20.77 arc90 4.63,20.64 4.63,19.68 arc90 4.76,19.55 6.79,19.55 arc90 6.91,19.68 6.91,20.64 arc90
  cutout Bottom: 5.64,27.12 3.61,27.12 arc90 3.49,26.99 3.49,24.76 arc90 3.61,24.63 5.64,24.63 arc90 5.77,24.76 5.77,26.99 arc90
  cutout Bottom: 6.6,24.33 3.8,24.33 arc90 3.68,24.2 3.68,21.2 arc90 3.8,21.07 6.6,21.07 arc90 6.72,21.2 6.72,24.2 arc90
N$2
  Top 0.203: R16.2 19.7,70.2 21.7,72.2 E2.A
N$3
  Top 0.203: P1.4 66.95,68.95 65.7,67.7 R10.2
N$4  (via drill 1)
  other vias: 69.2,39.2
N$5
  Top 0.203: R17.2 18.7,70.2 16.7,72.2 E2.B
N$6
  Top 0.203: P2.4 88.95,68.95 87.7,67.7 R11.2
N$7
  Top 0.203: P3.4 110.95,68.95 109.7,67.7 R12.2
N$8
  Top 0.203: E2.D R15.1
N$9
  cutout Bottom: 33.7,48.7 33.7,47.75 arc-90 33.45,47.5 28.95,47.5 arc-90 28.7,47.75 28.7,48.7 27.75,48.7 arc-90 27.5,48.95 27.5,53.45 arc-90 27.75,53.7 28.7,53.7 28.7,54.65 arc-90 28.95,54.9 33.45,54.9 arc-90 33.7,54.65 33.7,53.7 34.65,53.7 arc-90 34.9,53.45 34.9,48.95 arc-90 34.65,48.7
  cutout Bottom: 121.7,36.7 121.7,35.75 arc-90 121.45,35.5 116.95,35.5 arc-90 116.7,35.75 116.7,36.7 115.75,36.7 arc-90 115.5,36.95 115.5,41.45 arc-90 115.75,41.7 116.7,41.7 116.7,42.65 arc-90 116.95,42.9 121.45,42.9 arc-90 121.7,42.65 121.7,41.7 122.65,41.7 arc-90 122.9,41.45 122.9,36.95 arc-90 122.65,36.7
N$10
  Top 0.203: R19.2 8.7,42.16 TS2.1
N$11
  Top 0.203: R20.2 5.7,37.7 6.74,36.66 TS2.3
N$12
  cutout Bottom: 63.6,44.15 63.6,34.25 arc-90 63.35,34 61.85,34 arc-90 61.6,34.25 61.6,44.15 arc-90 61.85,44.4 63.35,44.4 arc-90
  cutout Bottom: 64.25,33.6 74.15,33.6 arc-90 74.4,33.35 74.4,31.85 arc-90 74.15,31.6 64.25,31.6 arc-90 64,31.85 64,33.35 arc-90
  cutout Bottom: 74.8,34.25 74.8,44.15 arc-90 75.05,44.4 76.55,44.4 arc-90 76.8,44.15 76.8,34.25 arc-90 76.55,34 75.05,34 arc-90
  cutout Bottom: 74.15,44.8 64.25,44.8 arc-90 64,45.05 64,46.55 arc-90 64.25,46.8 74.15,46.8 arc-90 74.4,46.55 74.4,45.05 arc-90
  cutout Bottom: 96.55,26.75 96.55,51.65 arc-90 96.8,51.9 98.3,51.9 arc-90 98.55,51.65 98.55,26.75 arc-90 98.3,26.5 96.8,26.5 arc-90
N$13
  Top 0.203: TS1.1 8.7,62.16 R23.2
N$14
  Top 0.203: R25.2 5.7,57.7 6.74,56.66 TS1.3
N$15
  Top 0.203: R13.2 131.7,64.87 128.9,67.68 S2.1
N$16
  Top 0.203: R14.2 128.7,64.7 128.2,65.2 119.98,65.2 S2.3
N$17
  Top 0.203: E1.A 21.7,44.2 19.7,42.2 R26.2
N$18
  Top 0.203: E1.B 16.7,44.2 18.7,42.2 R27.2
N$19
  Top 0.203: R24.1 E1.D
N$20
  Top 0.203: R32.2 14.45,11.25 S1.1
N$21
  Top 0.203: R33.2 23.95,11.25 S1.3
N$22
  Top 0.203: P4.2 66.95,9.45 65.7,10.7 R34.1
N$23
  Top 0.203: P5.2 88.95,9.45 87.7,10.7 R35.1
N$24
  Top 0.203: P6.2 110.95,9.45 109.7,10.7 R36.1
N$25
  Top 0.203: P9.1 42.45,31.45 43.2,30.7 R30.2
N$26
  Top 0.203: P12.1 128.45,31.45 129.2,30.7 R31.2
N$27
  Top 0.203: P8.1 42.95,41.45 44.2,40.2 R28.2
N$28
  Top 0.203: P11.1 128.95,41.45 130.2,40.2 R29.2
N$29
  Top 0.203: P7.1 43.45,51.45 45.2,49.7 R21.2
N$30
  Top 0.203: P10.1 129.45,51.45 131.2,49.7 R22.2
N$31
  cutout Bottom: 29.3,55.7 29.3,57.2 arc-90 29.55,57.45 30.85,57.45 arc-90 31.1,57.2 31.1,55.7 arc-90 30.85,55.45 29.55,55.45 arc-90
  cutout Bottom: 114.7,37.3 113.2,37.3 arc-90 112.95,37.55 112.95,38.85 arc-90 113.2,39.1 114.7,39.1 arc-90 114.95,38.85 114.95,37.55 arc-90
  cutout Bottom: 3.55,24.58 3.55,22.1 3.45,22 2.9,22 2.8,22.1 2.8,24.58 2.9,24.68 3.45,24.68
  cutout Bottom: 8.08,22.38 8.08,21.38 7.98,21.28 7.58,21.28 7.48,21.38 7.48,22.38 7.58,22.48 7.98,22.48
  cutout Top: 14.2,16.3 15.7,16.3 arc90 15.95,16.55 15.95,17.85 arc90 15.7,18.1 14.2,18.1 arc90 13.95,17.85 13.95,16.55 arc90
  cutout Top: 22.7,16.3 24.2,16.3 arc90 24.45,16.55 24.45,17.85 arc90 24.2,18.1 22.7,18.1 arc90 22.45,17.85 22.45,16.55 arc90
  cutout Top: 64.45,11.3 65.95,11.3 arc90 66.2,11.55 66.2,12.85 arc90 65.95,13.1 64.45,13.1 arc90 64.2,12.85 64.2,11.55 arc90
  cutout Top: 86.45,11.3 87.95,11.3 arc90 88.2,11.55 88.2,12.85 arc90 87.95,13.1 86.45,13.1 arc90 86.2,12.85 86.2,11.55 arc90
  cutout Top: 108.45,11.3 109.95,11.3 arc90 110.2,11.55 110.2,12.85 arc90 109.95,13.1 108.45,13.1 arc90 108.2,12.85 108.2,11.55 arc90
  cutout Top: 108.45,65.3 109.95,65.3 arc90 110.2,65.55 110.2,66.85 arc90 109.95,67.1 108.45,67.1 arc90 108.2,66.85 108.2,65.55 arc90
  cutout Top: 86.45,65.3 87.95,65.3 arc90 88.2,65.55 88.2,66.85 arc90 87.95,67.1 86.45,67.1 arc90 86.2,66.85 86.2,65.55 arc90
  cutout Top: 64.45,65.3 65.95,65.3 arc90 66.2,65.55 66.2,66.85 arc90 65.95,67.1 64.45,67.1 arc90 64.2,66.85 64.2,65.55 arc90
  cutout Top: 33.45,61.3 34.95,61.3 arc90 35.2,61.55 35.2,62.85 arc90 34.95,63.1 33.45,63.1 arc90 33.2,62.85 33.2,61.55 arc90
  cutout Top: 5.45,64.55 8.95,64.55 arc90 9.2,64.8 9.2,66.1 arc90 8.95,66.35 5.45,66.35 arc90 5.2,66.1 5.2,64.8 arc90
  cutout Top: 5.45,44.55 8.95,44.55 arc90 9.2,44.8 9.2,46.1 arc90 8.95,46.35 5.45,46.35 arc90 5.2,46.1 5.2,44.8 arc90
  cutout Top: 128.45,62.3 131.95,62.3 arc90 132.2,62.55 132.2,63.85 arc90 131.95,64.1 128.45,64.1 arc90 128.2,63.85 128.2,62.55 arc90
  cutout Top: 17.45,56.3 22.95,56.3 arc90 23.2,56.55 23.2,57.85 arc90 22.95,58.1 17.45,58.1 arc90 17.2,57.85 17.2,56.55 arc90
  cutout Top: 17.45,28.3 22.95,28.3 arc90 23.2,28.55 23.2,29.85 arc90 22.95,30.1 17.45,30.1 arc90 17.2,29.85 17.2,28.55 arc90
  cutout Top: 42.95,21.8 45.45,21.8 arc90 45.7,22.05 45.7,23.35 arc90 45.45,23.6 42.95,23.6 arc90 42.7,23.35 42.7,22.05 arc90
  cutout Top: 42.95,18.8 45.45,18.8 arc90 45.7,19.05 45.7,20.35 arc90 45.45,20.6 42.95,20.6 arc90 42.7,20.35 42.7,19.05 arc90
  cutout Top: 128.95,18.8 131.45,18.8 arc90 131.7,19.05 131.7,20.35 arc90 131.45,20.6 128.95,20.6 arc90 128.7,20.35 128.7,19.05 arc90
  cutout Top: 128.95,21.8 131.45,21.8 arc90 131.7,22.05 131.7,23.35 arc90 131.45,23.6 128.95,23.6 arc90 128.7,23.35 128.7,22.05 arc90
  cutout Top: 32.2,4.05 36.2,4.05 arc90 36.45,4.3 36.45,6.1 arc90 36.2,6.35 32.2,6.35 arc90 31.95,6.1 31.95,4.3 arc90
N$32
  cutout Top: 65.4,45 64.6,45 64.5,45.1 64.5,46.7 64.6,46.8 65.4,46.8 65.5,46.7 65.5,45.1
  cutout Top: 69.4,45 68.6,45 68.5,45.1 68.5,46.7 68.6,46.8 69.4,46.8 69.5,46.7 69.5,45.1
  cutout Top: 74.2,45 73.4,45 73.3,45.1 73.3,46.7 73.4,46.8 74.2,46.8 74.3,46.7 74.3,45.1
  cutout Top: 63.4,42.6 63.4,41.8 63.3,41.7 61.7,41.7 61.6,41.8 61.6,42.6 61.7,42.7 63.3,42.7
  cutout Top: 63.4,39 63.4,38.2 63.3,38.1 61.7,38.1 61.6,38.2 61.6,39 61.7,39.1 63.3,39.1
  cutout Top: 63.4,36.6 63.4,35.8 63.3,35.7 61.7,35.7 61.6,35.8 61.6,36.6 61.7,36.7 63.3,36.7
  cutout Top: 69.4,31.6 68.6,31.6 68.5,31.7 68.5,33.3 68.6,33.4 69.4,33.4 69.5,33.3 69.5,31.7
  cutout Top: 76.8,41.4 76.8,40.6 76.7,40.5 75.1,40.5 75,40.6 75,41.4 75.1,41.5 76.7,41.5
  cutout Top: 76.8,37.8 76.8,37 76.7,36.9 75.1,36.9 75,37 75,37.8 75.1,37.9 76.7,37.9
  cutout Bottom: 54.8,41.3 55.6,41.3 55.7,41.4 55.7,43 55.6,43.1 54.8,43.1 54.7,43 54.7,41.4
  cutout Bottom: 58.8,41.3 59.6,41.3 59.7,41.4 59.7,43 59.6,43.1 58.8,43.1 58.7,43 58.7,41.4
  cutout Bottom: 56,41.1 58.4,41.1 58.5,41.2 58.5,43.2 58.4,43.3 56,43.3 55.9,43.2 55.9,41.2
  cutout Bottom: 47.3,8.3 48.1,8.3 48.2,8.4 48.2,10 48.1,10.1 47.3,10.1 47.2,10 47.2,8.4
  cutout Bottom: 48.8,8.3 49.6,8.3 49.7,8.4 49.7,10 49.6,10.1 48.8,10.1 48.7,10 48.7,8.4
  cutout Bottom: 50.3,8.3 51.1,8.3 51.2,8.4 51.2,10 51.1,10.1 50.3,10.1 50.2,10 50.2,8.4
  cutout Bottom: 91.8,52.8 92.6,52.8 92.7,52.9 92.7,54.5 92.6,54.6 91.8,54.6 91.7,54.5 91.7,52.9
  cutout Bottom: 115.9,26.7 117.5,26.7 117.6,26.8 117.6,29.6 117.5,29.7 115.9,29.7 115.8,29.6 115.8,26.8
  cutout Bottom: 83.7,45.4 83.7,47 83.6,47.1 80.8,47.1 80.7,47 80.7,45.4 80.8,45.3 83.6,45.3
  cutout Bottom: 57.7,31.4 57.7,33 57.6,33.1 54.8,33.1 54.7,33 54.7,31.4 54.8,31.3 57.6,31.3
  cutout Bottom: 29.2,57.9 29.2,59.5 29.1,59.6 26.3,59.6 26.2,59.5 26.2,57.9 26.3,57.8 29.1,57.8
  cutout Bottom: 80,58.2 78.4,58.2 78.3,58.1 78.3,55.3 78.4,55.2 80,55.2 80.1,55.3 80.1,58.1
  cutout Bottom: 82.5,58.2 80.9,58.2 80.8,58.1 80.8,55.3 80.9,55.2 82.5,55.2 82.6,55.3 82.6,58.1
  cutout Bottom: 85,58.2 83.4,58.2 83.3,58.1 83.3,55.3 83.4,55.2 85,55.2 85.1,55.3 85.1,58.1
  cutout Bottom: 87.5,58.2 85.9,58.2 85.8,58.1 85.8,55.3 85.9,55.2 87.5,55.2 87.6,55.3 87.6,58.1
  cutout Bottom: 90,58.2 88.4,58.2 88.3,58.1 88.3,55.3 88.4,55.2 90,55.2 90.1,55.3 90.1,58.1
  cutout Bottom: 35,9.2 33.4,9.2 33.3,9.1 33.3,6.3 33.4,6.2 35,6.2 35.1,6.3 35.1,9.1
  cutout Bottom: 61.1,47.8 61.1,48.6 61,48.7 59.4,48.7 59.3,48.6 59.3,47.8 59.4,47.7 61,47.7
  cutout Bottom: 58.8,34.05 59.6,34.05 59.7,34.15 59.7,35.75 59.6,35.85 58.8,35.85 58.7,35.75 58.7,34.15
  cutout Bottom: 58.1,36.3 58.1,38.1 58,38.2 56.4,38.2 56.3,38.1 56.3,36.3 56.4,36.2 58,36.2
N$33
  Bottom 0.203: KMW.8 27.25,49.25 26.2,48.2 TP5.TP
N$34
  Top 0.254: R39.2 RGB.4
N$35
  Top 0.254: R38.2 RGB.5
N$37
  Bottom 0.203: KME.1 123.4,41.15 124.2,41.95 TP1.TP
N$38
  Bottom 0.203: KME.7 123.4,37.25 124.2,36.45 TP3.TP
N$39
  Bottom 0.203: KME.4 TP2.TP
N$41
  Top 0.254: R37.2 RGB.6
N$43
  Top 0.203: R18.1 34.7,63.7 35.95,64.95 P13.4
N$44
  Bottom 0.203: KMW.15 29.25,55.15 28.2,56.2 TP4.TP
N$45  (via drill 0.25)
  Top 0.203: RESET.4 47.62,10.38 v48.45,11.2
  Bottom 0.203: v48.45,11.2 48.7,11.2 49.2,10.7 R48.1
N$46
  Bottom 0.152: R40.1 92.2,54.95 92.45,55.2 93.3,55.2 93.55,54.95 Q1.1
OSC1
  Bottom 0.152: U1.49 60.35,43.6 59.95,43.2 59.95,41.95 59.8,41.8 C20.1
  Bottom 0.203: X1.3 57.95,41.8 C20.1
OSC2
  Bottom 0.152: X1.1 56.55,43.55 57,44 U1.50
  Bottom 0.203: X1.1 56.45,42.6 C19.1
P1  (via drill 0.25)
  Top 0.203: C21.1 64.7,65.2 64.95,64.95 65.7,64.95 | 65.7,64.95 R10.1 | 65.7,64.95 67.45,63.2 v79.2,63.2
  Bottom 0.203: v79.2,63.2 80.7,61.7 92.2,61.7 96.2,65.7 100.2,65.7 104.2,61.7 109.2,61.7 113.2,57.7 113.2,43.2 115.25,41.15 KME.21
P2  (via drill 0.25)
  Top 0.203: C22.1 86.7,65.2 86.95,64.95 87.7,64.95 | 87.7,64.95 R11.1 | 87.7,64.95 v87.7,63.2
  Bottom 0.203: v87.7,63.2 88.7,62.2 91.7,62.2 95.7,66.2 100.7,66.2 104.7,62.2 109.7,62.2 113.7,58.2 113.7,46.7 117.25,43.15 KME.22
P3  (via drill 0.25)
  Top 0.203: C23.1 108.7,65.2 108.95,64.95 109.7,64.95 | 109.7,64.95 R12.1 | 109.7,64.95 v109.7,63.2
  Bottom 0.203: v109.7,63.2 114.2,58.7 114.2,47.2 117.9,43.5 KME.23
P4  (via drill 0.25)
  Top 0.203: C45.2 64.7,13.2 64.95,13.45 65.7,13.45 | 65.7,13.45 R34.2 | 65.7,13.45 67.45,15.2 v79.2,15.2
  Bottom 0.203: v79.2,15.2 80.7,16.7 92.2,16.7 96.2,12.7 100.2,12.7 104.2,16.7 109.2,16.7 113.2,20.7 113.2,35.2 115.25,37.25 KME.15
P5  (via drill 0.25)
  Top 0.203: C46.2 86.7,13.2 86.95,13.45 87.7,13.45 | 87.7,13.45 R35.2 | 87.7,13.45 v87.7,15.2
  Bottom 0.203: v87.7,15.2 88.7,16.2 91.7,16.2 95.7,12.2 100.7,12.2 104.7,16.2 109.7,16.2 113.7,20.2 113.7,31.7 117.25,35.25 KME.14
P6  (via drill 0.25)
  Top 0.203: C47.2 108.7,13.2 108.95,13.45 109.7,13.45 | 109.7,13.45 R36.2 | 109.7,13.45 v109.7,15.2
  Bottom 0.203: v109.7,15.2 114.2,19.7 114.2,31.2 117.9,34.9 KME.13
P7  (via drill 0.25)
  Top 0.203: v64.2,22.2 65.2,21.2 114.7,21.2 v116.7,23.2 | R21.1 v45.2,21.2 C32.2
  Bottom 0.203: KME.12 118.55,25.05 v116.7,23.2 | v64.2,22.2 63.7,21.7 45.7,21.7 v45.2,21.2
P8  (via drill 0.25)
  Top 0.203: v62.2,22.7 64.2,20.7 115.7,20.7 v117.7,22.7 | R28.1 v44.2,21.2 C34.2
  Bottom 0.203: KME.11 119.2,24.2 v117.7,22.7 | v62.2,22.7 61.7,22.2 45.2,22.2 v44.2,21.2
P9  (via drill 0.25)
  Top 0.203: v60.2,23.2 63.2,20.2 116.7,20.2 v118.7,22.2 | R30.1 v43.2,21.2 C41.2
  Bottom 0.203: KME.10 119.85,23.35 v118.7,22.2 | v60.2,23.2 59.7,22.7 44.7,22.7 v43.2,21.2
P10  (via drill 0.25)
  Top 0.203: C33.2 v131.2,21.2 R22.1 | v124.2,23.2 122.2,25.2 122.2,40.7 120.7,42.2 116.7,42.2 116.2,41.7 v113.2,41.7
  Bottom 0.203: v131.2,21.2 129.7,22.7 124.7,22.7 v124.2,23.2 | KME.20 114.4,40.5 v113.2,41.7
P11  (via drill 0.25)
  Top 0.203: C35.2 v130.2,21.2 R29.1 | v123.2,22.7 121.7,24.2 121.7,40.2 120.2,41.7 117.2,41.7 116.2,40.7 v113.2,40.7
  Bottom 0.203: v130.2,21.2 129.2,22.2 123.7,22.2 v123.2,22.7 | KME.19 114.05,39.85 v113.2,40.7
P12  (via drill 0.25)
  Top 0.203: C42.2 v129.2,21.2 R31.1 | v122.2,22.2 121.2,23.2 121.2,39.7 119.7,41.2 117.7,41.2 116.2,39.7 v113.2,39.7
  Bottom 0.203: v129.2,21.2 128.7,21.7 122.7,21.7 v122.2,22.2 | KME.18 113.7,39.2 v113.2,39.7
P13  (via drill 0.25)
  Top 0.203: C29.1 33.7,61.2 33.95,60.95 34.7,60.95 | 34.7,60.95 R18.2 | 34.7,60.95 v36.7,58.95
  Bottom 0.203: KMW.23 35.5,52.5 36.7,53.7 v36.7,58.95
PGEC1  (via drill 0.25)
  Top 0.203: v59.7,27.2 53.01,20.51 ICSP.5
  Bottom 0.152: v59.7,27.2 62.7,27.2 64.8,29.3 U1.24
PGED1  (via drill 0.25)
  Top 0.203: v59.2,27.7 52.2,20.7 52.2,10.2 50.47,8.47 ICSP.4
  Bottom 0.152: v59.2,27.7 62.7,27.7 64.4,29.4 U1.25
PMD0  (via drill 0.25)
  Top 0.152: v83.2,35.7 v85.45,37.95
  Bottom 0.152: v85.45,37.95 83.7,37.95 81.95,36.2 79.7,36.2 77.9,38 U1.91 | TFT.32 86.7,35.95 86.2,36.45 83.95,36.45 v83.2,35.7
PMD1
  Bottom 0.152: TFT.31 86.95,36.45 86.2,37.2 83.7,37.2 82.2,35.7 79.2,35.7 78.1,36.8 U1.94
PMD2  (via drill 0.25)
  Top 0.152: v83.95,35.7 v86.2,37.95
  Bottom 0.152: TFT.30 87.2,36.95 v86.2,37.95 | v83.95,35.7 83.45,35.2 U1.98
PMD3  (via drill 0.25)
  Top 0.152: v84.7,35.7 v86.95,37.95
  Bottom 0.152: TFT.29 87.45,37.45 v86.95,37.95 | v84.7,35.7 83.8,34.8 U1.99
PMD4  (via drill 0.25)
  Top 0.152: v85.45,35.7 v87.7,37.95
  Bottom 0.152: TFT.28 v87.7,37.95 | v85.45,35.7 84.15,34.4 U1.100
PMD5  (via drill 0.25)
  Top 0.152: v73.7,34.7 74.2,35.2 79.7,35.2 v81.7,37.2
  Bottom 0.152: U1.3 73.19,34.19 v73.7,34.7 | v81.7,37.2 82.2,37.2 83.45,38.45 TFT.27
PMD6  (via drill 0.25)
  Top 0.152: v73.2,35.2 73.7,35.7 79.45,35.7 v80.95,37.2
  Bottom 0.152: U1.4 72.81,34.81 v73.2,35.2 | v80.95,37.2 81.45,37.7 81.95,37.7 83.2,38.95 TFT.26
PMD7  (via drill 0.25)
  Top 0.152: v72.7,35.7 73.2,36.2 79.2,36.2 v80.2,37.2
  Bottom 0.152: U1.5 72.4,35.4 v72.7,35.7 | v80.2,37.2 81.2,38.2 81.7,38.2 82.95,39.45 TFT.25
PMD8
  Bottom 0.152: TFT.24 82.45,39.95 81.7,39.2 U1.88
PMD9
  Bottom 0.152: TFT.23 82.2,40.45 81.35,39.6 U1.87
PMD10
  Bottom 0.152: TFT.22 81.95,40.95 81,40 U1.86
PMD11
  Bottom 0.152: TFT.21 81.7,41.45 80.65,40.4 U1.85
PMD12
  Bottom 0.152: TFT.20 80.95,41.95 80.1,42.8 U1.79
PMD13  (via drill 0.25)
  Top 0.152: v80.2,41.95 81.7,41.95 82.2,42.45 v87.7,42.45
  Bottom 0.152: TFT.19 v87.7,42.45 | v80.2,41.95 79.75,42.4 U1.80
PMD14
  Bottom 0.152: TFT.18 81.95,42.95 81.3,43.6 U1.77
PMD15  (via drill 0.25)
  Top 0.152: v81.2,42.95 81.7,43.45 v87.7,43.45
  Bottom 0.152: TFT.17 v87.7,43.45 | v81.2,42.95 80.95,43.2 U1.78
PMRD  (via drill 0.25)
  Top 0.152: v70.2,36.7 70.2,35.7 72.7,33.2 v85.7,33.2
  Bottom 0.152: U1.9 70.8,36.1 v70.2,36.7 | TFT.35 86.95,34.45 v85.7,33.2
PMWR  (via drill 0.25)
  Top 0.152: v70.7,37.2 70.7,35.95 72.95,33.7 v86.95,33.7
  Bottom 0.152: U1.8 71.2,36.7 v70.7,37.2 | TFT.36 87.2,33.95 v86.95,33.7
R  (via drill 0.25)
  Top 0.254: RGB.3 32.6,19.1 v32.7,19.2
  Bottom 0.203: v32.7,19.2 32.7,22.2 34.15,23.65 34.2,45.7 33.15,46.75 KMW.1
RA5  (via drill 0.25)
  Top 0.152: v73.2,30.7 76.2,27.7 v89.2,27.7
  Bottom 0.152: U1.2 73.6,31.1 v73.2,30.7 | TFT.47 89.95,28.45 v89.2,27.7
RB12  (via drill 0.25)
  Top 0.152: v78.95,48.2 77.95,47.2 77.7,47.2 76.4,45.9 76.4,44.05 74.75,42.4 72.4,42.4 v71.2,41.2
  Bottom 0.152: U1.41 70.4,40.4 v71.2,41.2 | TFT.9 86.7,47.45 84.95,49.2 79.95,49.2 v78.95,48.2
RB13  (via drill 0.25)
  Top 0.152: v78.2,48.2 76,46 76,44.25 74.55,42.8 71.8,42.8 v70.7,41.7
  Bottom 0.152: U1.42 69.8,40.8 v70.7,41.7 | TFT.8 86.95,47.95 85.2,49.7 79.7,49.7 v78.2,48.2
RG15  (via drill 0.25)
  Top 0.152: v77.2,30.7 v91.2,30.7
  Bottom 0.152: U1.1 74,31.15 74.45,30.7 v77.2,30.7 | TFT.39 92.95,32.45 v91.2,30.7
RPB5  (via drill 0.25)
  Top 0.152: v65.2,27.2 67.2,25.2 v67.2,23.2
  Bottom 0.152: U1.20 66.4,29.65 65.2,28.45 v65.2,27.2 | v67.2,23.2 67.2,19.7 55.55,8.05 ICSP.6
RPB14  (via drill 0.25)
  Top 0.152: v78.2,48.95 77.2,47.95 77.2,47.7 75.6,46.1 75.6,44.45 74.35,43.2 71.2,43.2 v70.2,42.2
  Bottom 0.152: v70.2,42.2 69.2,41.2 U1.43 | TFT.7 87.2,48.45 85.45,50.2 79.45,50.2 v78.2,48.95
RPB15  (via drill 0.25)
  Top 0.152: v77.45,48.95 76.7,48.2 76.7,47.7 75.2,46.2 75.2,44.65 74.15,43.6 70.6,43.6 v70.2,43.2
  Bottom 0.152: U1.44 68.6,41.6 v70.2,43.2 | TFT.6 87.45,48.95 85.7,50.7 79.2,50.7 v77.45,48.95
RPD10  (via drill 0.25)
  Top 0.152: v70.2,51.2 75.7,51.2 77.2,52.7 89.2,52.7 89.7,52.2 v92.2,52.2
  Bottom 0.152: U1.69 71.6,48.85 72.2,49.45 72.2,49.95 70.95,51.2 v70.2,51.2 | R40.2 v92.2,52.2
RPD11  (via drill 0.25)
  Top 0.152: v78.95,47.45 78.2,46.7 77.7,46.7 76.8,45.8 76.8,43.85 74.95,42 73.5,42 v73.2,41.7
  Bottom 0.152: U1.70 72,44.4 73.2,43.2 v73.2,41.7 | TFT.10 86.45,46.95 84.7,48.7 80.2,48.7 v78.95,47.45
RPE8  (via drill 0.25)
  Top 0.152: v68.7,25.7 v66.2,28.2
  Bottom 0.152: UART.3 78.74,7.16 74.7,11.2 74.7,19.7 v68.7,25.7 | U1.18 67.2,29.2 v66.2,28.2
RPE9  (via drill 0.25)
  Top 0.152: v68.2,25.2 v65.7,27.7
  Bottom 0.152: UART.1 73.66,19.74 v68.2,25.2 | U1.19 66.8,29.55 65.7,28.45 v65.7,27.7
RPG9  (via drill 0.25)
  Top 0.152: v68.2,35.2 69.2,35.2 72.2,32.2 v85.7,32.2
  Bottom 0.152: U1.16 68,35 v68.2,35.2 | TFT.46 88.95,28.95 v85.7,32.2
S1_A  (via drill 0.25)
  Top 0.203: R32.1 14.45,18.45 | 14.45,18.45 15.2,18.45 15.45,18.2 C44.1 | 14.45,18.45 v14.45,19.2
  Bottom 0.203: KMW.3 31.85,28.85 25.7,22.7 17.95,22.7 v14.45,19.2
S1_B  (via drill 0.25)
  Top 0.203: R33.1 23.95,18.45 | 23.95,18.45 23.2,18.45 22.95,18.2 C43.1 | 23.95,18.45 v23.95,19.2
  Bottom 0.203: KMW.2 32.5,27.75 v23.95,19.2
S2_A  (via drill 0.25)
  Top 0.203: R13.1 131.7,61.95 | 131.7,61.95 130.95,61.95 130.7,62.2 C25.1 | 131.7,61.95 v131.7,59.7
  Bottom 0.203: v131.7,59.7 131.7,58.7 128.2,55.2 123.7,55.2 121.15,52.65 KME.28
S2_B  (via drill 0.25)
  Top 0.203: C24.1 129.7,62.2 129.45,61.95 128.7,61.95 | 128.7,61.95 R14.1 | 128.7,61.95 v128.7,59.7
  Bottom 0.203: v128.7,59.7 128.7,58.7 126.2,56.2 123.2,56.2 120.5,53.5 KME.27
SCK6  (via drill 0.25)
  Top 0.152: v65.7,42.7 65.7,39.45 72.45,32.7 v89.7,32.7
  Bottom 0.152: U1.48 65.2,43.2 v65.7,42.7 | TFT.37 91.95,33.45 91.2,32.7 v89.7,32.7
SCL1  (via drill 0.25)
  Top 0.152: v70.7,50.7 75.95,50.7 77.45,52.2 88.7,52.2 93.2,47.7 v93.2,31.2
  Bottom 0.152: U1.66 70.4,50.4 v70.7,50.7 | TFT.44 94.45,29.95 v93.2,31.2
SCL4  (via drill 0.25)
  Top 0.152: I2C.1 95.66,10.74 v88.2,18.2
  Bottom 0.152: v88.2,18.2 82.2,24.2 72.2,24.2 69.6,26.8 U1.12
SDA1  (via drill 0.25)
  Top 0.152: v71.2,50.2 76.2,50.2 77.7,51.7 88.2,51.7 92.7,47.2 v92.7,30.45
  Bottom 0.152: U1.67 70.8,49.8 v71.2,50.2 | TFT.45 93.7,29.45 v92.7,30.45
SDA4  (via drill 0.25)
  Top 0.152: I2C.3 100.74,6.66 v89.2,18.2
  Bottom 0.152: v89.2,18.2 82.7,24.7 72.45,24.7 70,27.15 U1.11
SDI6
  Bottom 0.152: U1.7 71.6,30.55 72.45,29.7 80.7,29.7 86.45,35.45 TFT.33
SDO6
  Bottom 0.152: U1.10 70.4,30.5 71.7,29.2 80.95,29.2 86.7,34.95 TFT.34
TCK
  Bottom 0.152: U1.38 53.7,39.2 51.2,41.7 51.2,64.2 47.2,68.2
  Bottom 0.203: 47.2,68.2 JTAG.6
TDI
  Bottom 0.152: U1.39 54.05,39.6 51.7,41.95 51.7,64.7 51.2,65.2
  Bottom 0.203: 51.2,65.2 JTAG.10
TDO  (via drill 0.25)
  Top 0.152: v52.2,65.7 v49.2,68.7
  Bottom 0.152: U1.40 54.4,40 52.2,42.2 v52.2,65.7
  Bottom 0.203: v49.2,68.7 JTAG.8
TMS  (via drill 0.25)
  Top 0.152: v55.7,28.2 v55.7,35.2
  Bottom 0.152: 45.2,69.2 50.7,63.7 50.7,37.2 52.7,35.2 v55.7,35.2 | U1.17 67.6,28.6 64.2,25.2 58.7,25.2 v55.7,28.2
  Bottom 0.203: JTAG.4 45.2,69.2
TS1_A  (via drill 0.25)
  Top 0.203: C37.1 7.7,66.45 7.95,66.7 8.7,66.7 | 8.7,66.7 R23.1 | 8.7,66.7 v8.7,69.2
  Bottom 0.203: KMW.20 32.5,59.4 30.7,61.2 24.7,61.2 14.7,71.2 10.7,71.2 v8.7,69.2
TS1_B  (via drill 0.25)
  Top 0.203: R25.1 5.7,66.7 | 5.7,66.7 6.45,66.7 6.7,66.45 C36.1 | 5.7,66.7 v5.7,69.2
  Bottom 0.203: KMW.21 33.15,59.75 31.2,61.7 25.2,61.7 14.7,72.2 8.7,72.2 v5.7,69.2
TS2_A  (via drill 0.25)
  Top 0.203: C31.1 7.7,46.45 7.95,46.7 8.7,46.7 | 8.7,46.7 R19.1 | 8.7,46.7 v8.7,49.2
  Bottom 0.203: v8.7,49.2 10.05,50.55 KMW.10
TS2_B  (via drill 0.25)
  Top 0.203: R20.1 5.7,46.7 | 5.7,46.7 6.45,46.7 6.7,46.45 C30.1 | 5.7,46.7 v5.7,49.2
  Bottom 0.203: KMW.11 7.7,51.2 v5.7,49.2
USBID
  Bottom 0.152: USB.4 76.85,68.85 66.4,58.4 U1.56
VBUS
  Bottom 0.152: U1.51 64.4,47.5 63.7,48.2
  Bottom 0.4: USB.1 74.9,69.4 64.4,58.9 64.4,48.9 63.7,48.2 63.65,48.2
  Bottom 0.5: 63.65,48.2 D10.A
VOUT_B
  Bottom 0.152: R45.2 4.1,24.26 U2.8
  Bottom 0.406: U2.8 4.1,23.8
  Bottom 0.508: 4.1,23.8 4.1,25.24 | 4.1,25.24 C53.1 | 4.1,25.24 4.1,26.44 FB2.1

## Text on the board
Dimension: CUT OUT
_tsilk: Copyright (C) 2018 H.Poetzl / Licensed under CERN OHL v.1.2 | 5V | AXIOM / REMOTE / PROTOTYPE | DAT | !RST | VCC | VSS | CLK | AUX | RCD | GND | TXD | SCL | GND | SDA | V0.9 R1.0